# Altium PCB pcb.PcbDoc
Units mil, origin at the board's own origin, x right, y up, seen from the top; angles counter-clockwise.
Board outline 1685 x 2080 mil, 2 copper layers (Top Layer, Bottom Layer); 23 components, 48 nets, 155 pads, 23 vias.
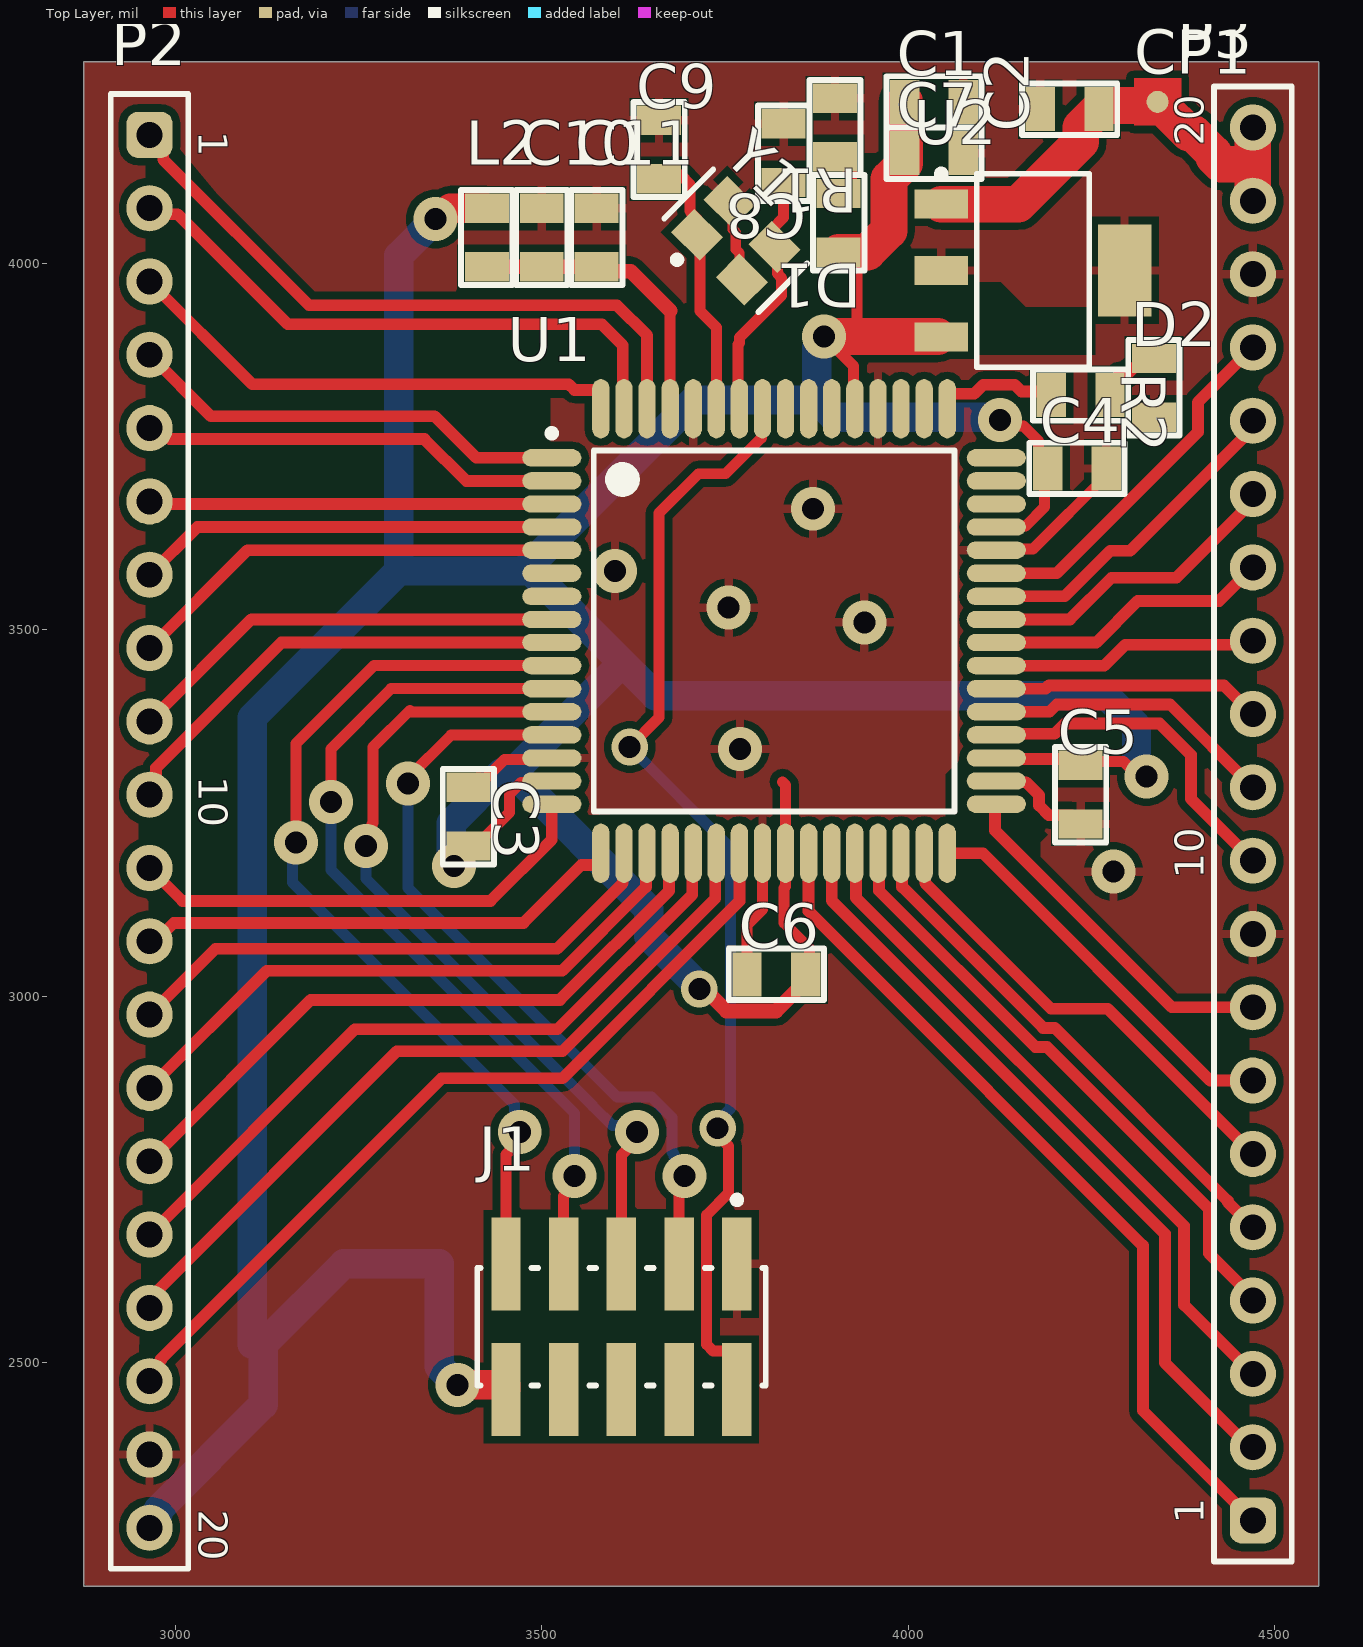
[diagram p0: Top Layer view]
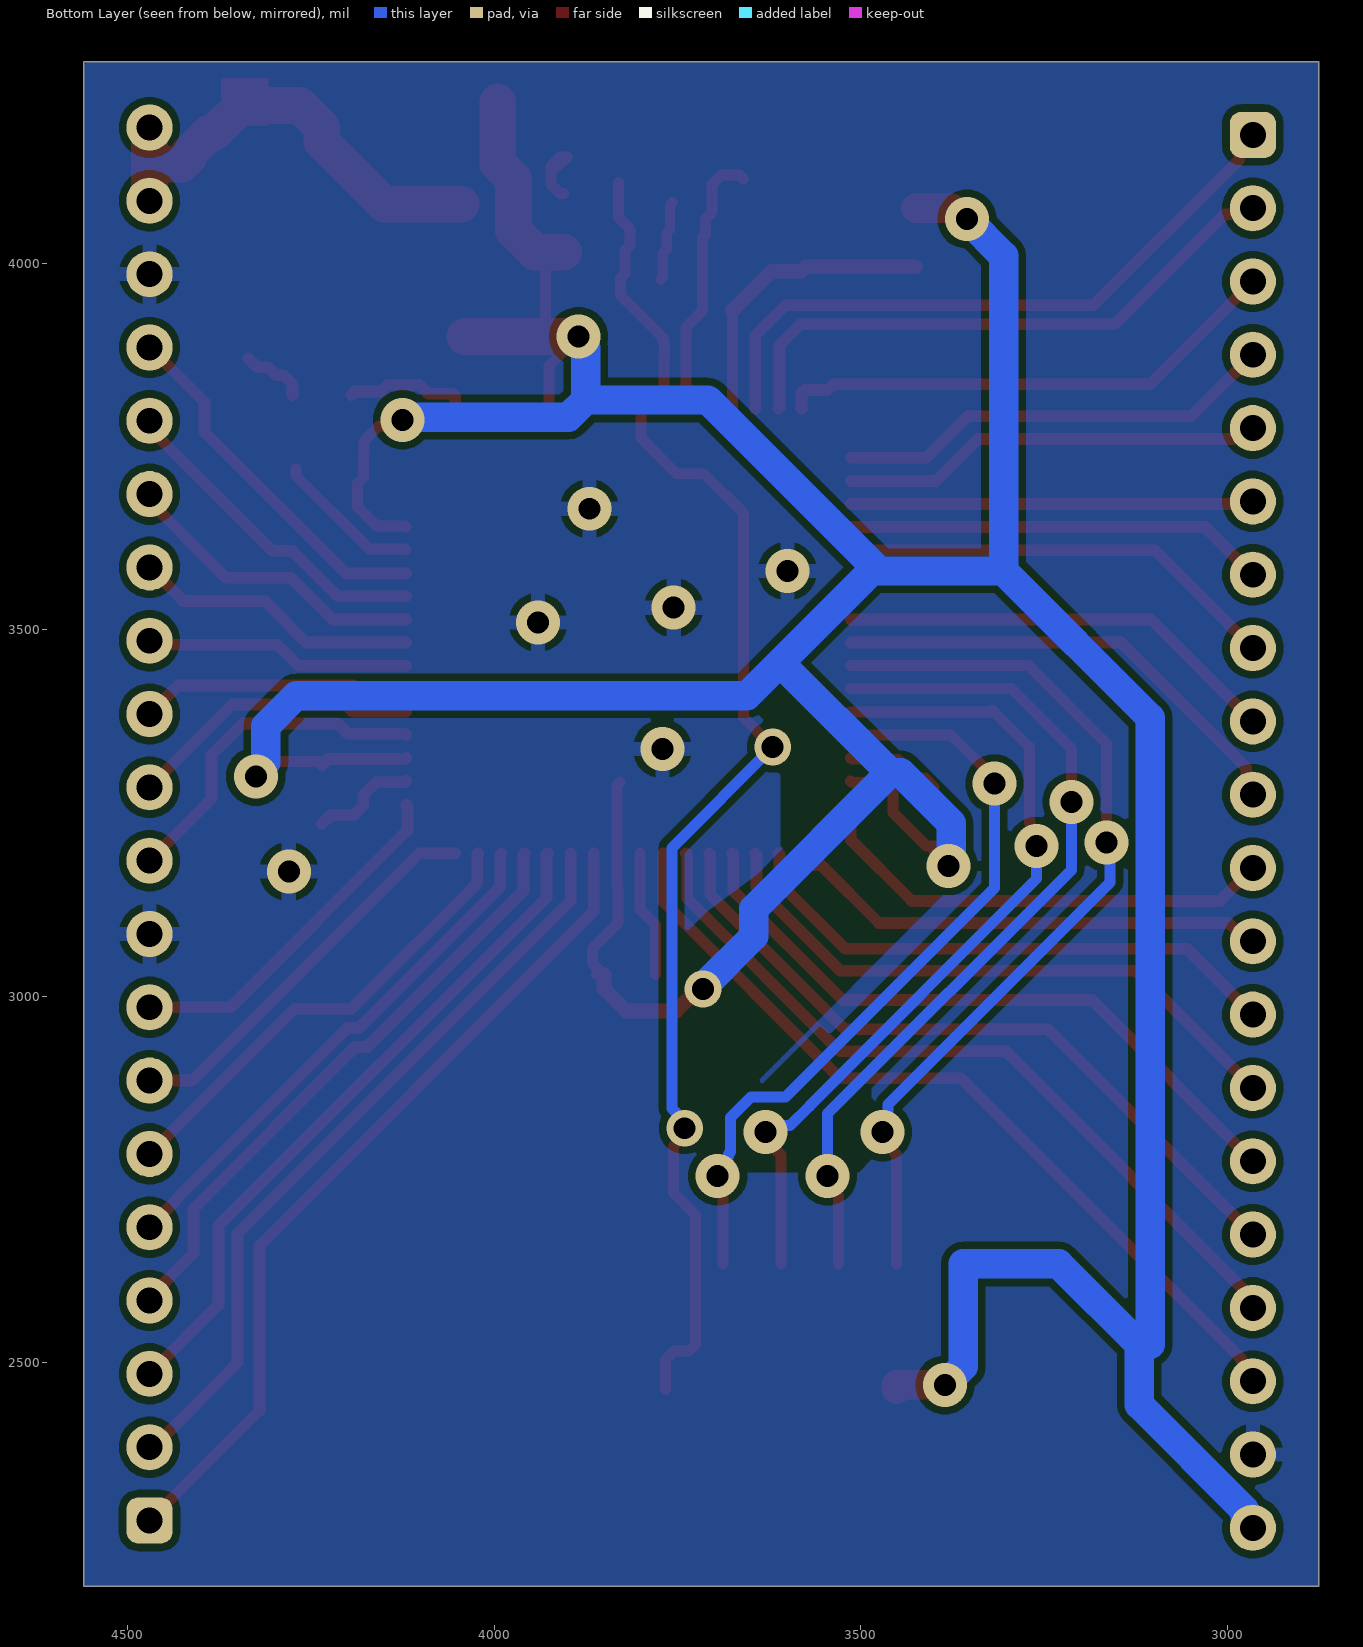
[diagram p1: Bottom Layer view, seen from below]
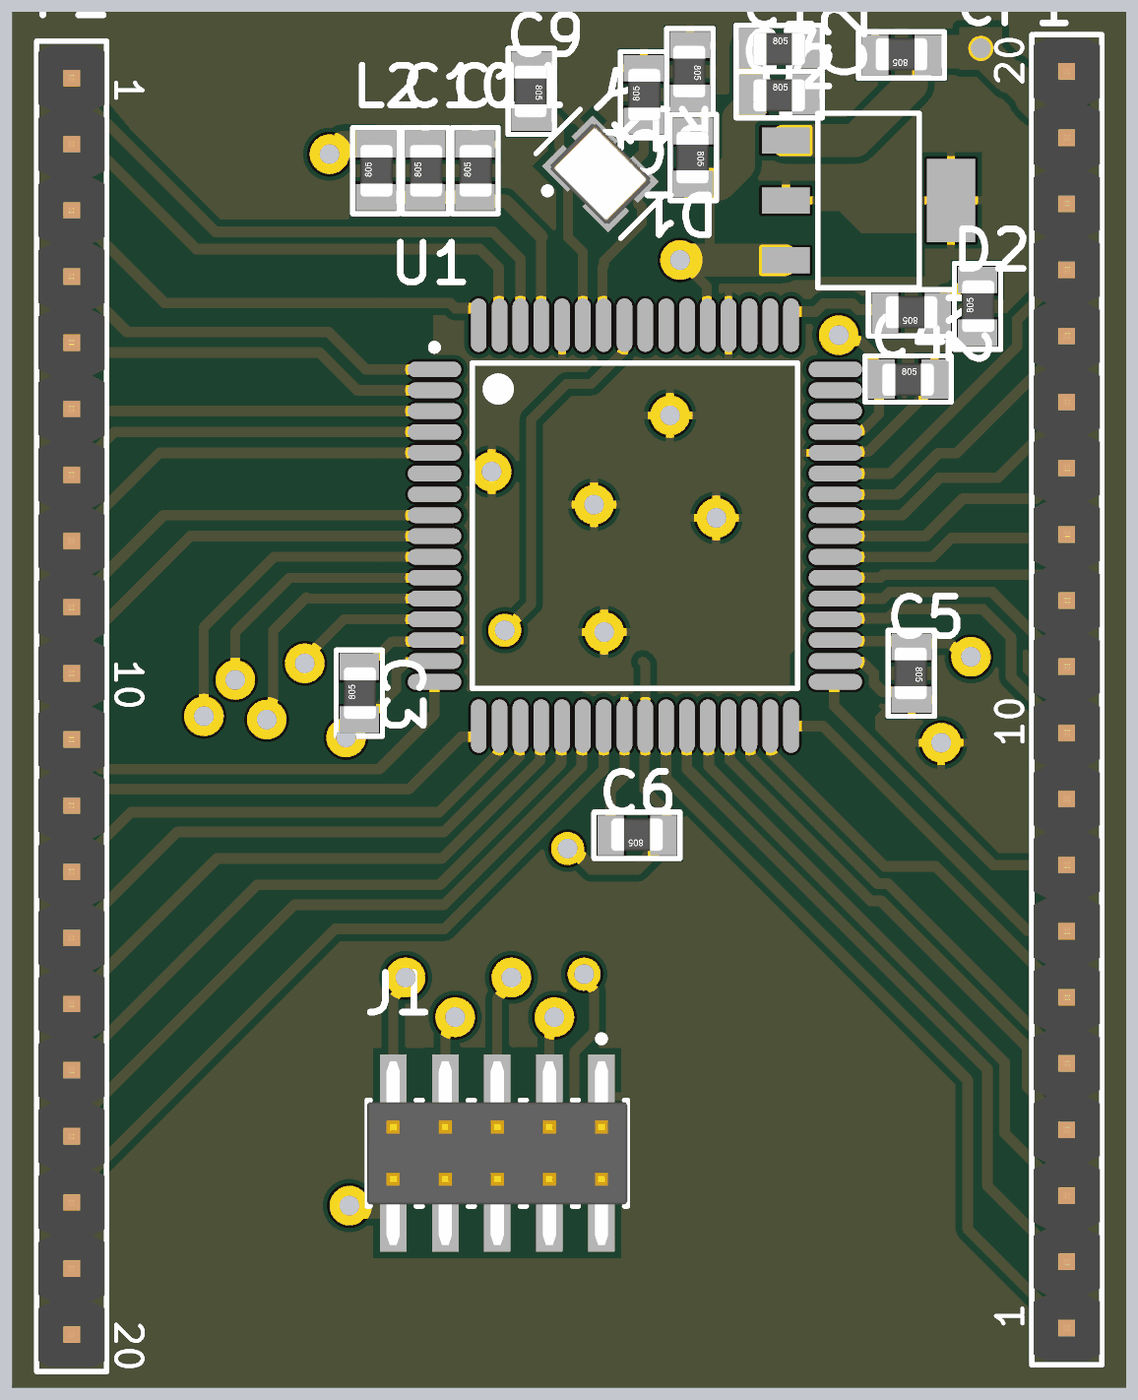
[diagram p2: 3D render of the assembled board from above, using the file's embedded part models]

## Layer stack, top to bottom
Top Solder: solder mask 0.4, Solder Resist, Dk 3.5
Top Layer: signal copper 1.4
Dielectric 1: dielectric 12.6, FR-4, Dk 4.8
Bottom Layer: signal copper 1.4
Bottom Solder: solder mask 0.4, Solder Resist, Dk 3.5

## Board outline
2875,2195 2875,4275 4560,4275 4560,2195

## Design rules (kind name [scope] priority, off if disabled: settings)
Clearance [All] p1: gap=10 ignorepadtopadclearanceinfootprint=FALSE except(5: SMDPad-SMDPad THPad-THPad)
DiffPairsRouting [All] p1: maxlimit=10 minlimit=10 mostfreqgap=10 toplayer_minwidth=15 toplayer_maxwidth=15 toplayer_prefwidth=15 bottomlayer_minwidth=15 bottomlayer_maxwidth=15 bottomlayer_prefwidth=15 maxuncoupledlength=500
PlaneConnect [All] p1: pad.planeconnectstyle=Relief pad.reliefexpansion=20 pad.reliefentries=4 pad.reliefconductorwidth=20 pad.reliefairgap=10 via.planeconnectstyle=Relief via.reliefexpansion=20 via.reliefentries=4 via.reliefconductorwidth=25 via.reliefairgap=10
PolygonConnect [All] p1: connectstyle=Relief reliefconductorwidth=12 reliefentries=4 polygonreliefangle="90 Angle" airgapwidth=10
RoutingVias [All] p1: holewidth=28 width=50 viastyle="Through Hole" minholewidth=28 minwidth=50 maxholewidth=28 maxwidth=50
SolderMaskExpansion [All] p1: expansion=4 istentingtop=FALSE
Width [All] p1: maxlimit=50 minlimit=10 preferedwidth=15 minimp=50.000000 maximp=50.000000 favimp=50.000000
28 further rules are at their usual default settings.

## Classes and differential pairs
differential pair XTAL: +XTAL_P -XTAL_N

## Components (designator, comment, footprint, x,y, rotation, side; value= is the part's Value field where it differs from the comment)
C1 "Capacitor" SMD-0805-RES 4035,4220 r270 top value=1u
C2 "Capacitor" SMD-0805-RES 4220,4210 r90 top value=1u
C3 "Capacitor" SMD-0805-RES 3400,3245 r0 top value=100n
C4 "Capacitor" SMD-0805-RES 4230,3720 r270 top value=100n
C5 "Capacitor" SMD-0805-RES 4235,3275 r180 top value=100n
C6 "Capacitor" SMD-0805-RES 3820,3030 r90 top value=100n
C7 "Capacitor" SMD-0805-RES 4035,4150 r270 top value=10u
C8 "Capacitor" SMD-0805-RES 3830,4150 r0 top value=12p
C9 "Capacitor" SMD-0805-RES 3660,4155 r180 top value=12p
C10 "Capacitor" SMD-0805-RES 3500,4035 r0 top value=10u
C11 "Capacitor" SMD-0805-RES 3575,4035 r0 top value=100n
CP1 "CONNECT_PAD" PAD_SQUARE 4340,4220 r0 top
D1 "Light-Emitting Diode" SMD-0805-RES 3905,4055 r180 top
D2 "Light-Emitting Diode" SMD-0805-RES 4335,3830 r0 top
J1 "TMM-105-01-L-D-SM" FP-TMM-105-01-L-D-SM-MFG 3608.74,2549.27 r180 top
L2 "Inductor" SMD-0805-RES 3425,4035 r0 top value=1u
P2 "61302011121" 61302011121 2965,3225 r270 top
P3 "61302011121" 61302011121 4470,3235 r90 top
R1 "Resistor" SMD-0805-RES 3900,4185 r180 top value=100R
R2 "Resistor" SMD-0805-RES 4235,3820 r90 top value=200R
U1 "ATxmega256A3-AU" 64A_M 3816.85,3498.27 r0 top
U2 "MCP1703A-3302E/DB" MCHP-SOT-223-DB3_N 4170,3990 r0 top
Y1 "TSX-3225 16.0000MF18X-AC3" FP-TSX-3225-MFG 3764.6,4030.4 r315 top

## Footprints (in the part's own frame and the unit in brackets; to place one, negate y for a bottom-side part, rotate by r counter-clockwise, add the part's x,y. Pads: shape width x height; smd on the part's side, far side on the other; paste and mask are expansions set on the pad)
64A_M [mm] "Thin QFP, 64-Leads, Body 14x14mm, Pitch 0.8mm, IPC Low Density"
  oval 2.05x0.6 smd: 1(-7.7,6) 2(-7.7,5.2) 3(-7.7,4.4) 4(-7.7,3.6) 5(-7.7,2.8) 6(-7.7,2) 7(-7.7,1.2) 8(-7.7,0.4) 9(-7.7,-0.4) 10(-7.7,-1.2) 11(-7.7,-2) 12(-7.7,-2.8) 13(-7.7,-3.6) 14(-7.7,-4.4) 15(-7.7,-5.2) 16(-7.7,-6) 33(7.7,-6) 34(7.7,-5.2) 35(7.7,-4.4) 36(7.7,-3.6) 37(7.7,-2.8) 38(7.7,-2) 39(7.7,-1.2) 40(7.7,-0.4) 41(7.7,0.4) 42(7.7,1.2) 43(7.7,2) 44(7.7,2.8) 45(7.7,3.6) 46(7.7,4.4) 47(7.7,5.2) 48(7.7,6)
  oval 0.6x2.05 smd: 17(-6,-7.7) 18(-5.2,-7.7) 19(-4.4,-7.7) 20(-3.6,-7.7) 21(-2.8,-7.7) 22(-2,-7.7) 23(-1.2,-7.7) 24(-0.4,-7.7) 25(0.4,-7.7) 26(1.2,-7.7) 27(2,-7.7) 28(2.8,-7.7) 29(3.6,-7.7) 30(4.4,-7.7) 31(5.2,-7.7) 32(6,-7.7) 49(6,7.7) 50(5.2,7.7) 51(4.4,7.7) 52(3.6,7.7) 53(2.8,7.7) 54(2,7.7) 55(1.2,7.7) 56(0.4,7.7) 57(-0.4,7.7) 58(-1.2,7.7) 59(-2,7.7) 60(-2.8,7.7) 61(-3.6,7.7) 62(-4.4,7.7) 63(-5.2,7.7) 64(-6,7.7)
  silkscreen extent -7.82,-6.25 6.25,6.97, body extent -7,-7 7,7, height 1.6
61302011121 [mm] "Pin Header, pitch 2.54 mm, THT, Vertical, single row, 20p"
  rrect50% 1.6x1.6 hole 0.897: 1(-24.13,0)
  round 1.6 hole 0.897: 2(-21.59,0) 3(-19.05,0) 4(-16.51,0) 5(-13.97,0) 6(-11.43,0) 7(-8.89,0) 8(-6.35,0) 9(-3.81,0) 10(-1.27,0) 11(1.27,0) 12(3.81,0) 13(6.35,0) 14(8.89,0) 15(11.43,0) 16(13.97,0) 17(16.51,0) 18(19.05,0) 19(21.59,0) 20(24.13,0)
  silkscreen extent -25.55,-1.35 25.55,1.35, body extent -25.4,-1.27 25.4,1.27, height 8.57
FP-TMM-105-01-L-D-SM-MFG [mm]
  rect 1.02x3.215 smd paste+0 mask+0: 1(-4,-2.177) 2(-4,2.177) 3(-2,-2.177) 4(-2,2.177) 5(0,-2.177) 6(0,2.177) 7(2,-2.177) 8(2,2.177) 9(4,-2.177) 10(4,2.177)
  silkscreen extent -5,-4.52 5,2.03, body extent -5.1,-3.89 5.1,3.89, height 0.25
FP-TSX-3225-MFG [mm]
  rect 1.4x1.15 smd paste+0 mask+0: 1(-1.1,-0.8) 2(1.1,-0.8) 3(1.1,0.8) 4(-1.1,0.8)
  silkscreen extent -2.3,-2.02 2.3,1.2, body extent -1.9,-1.47 1.9,1.47, height 0.25
MCHP-SOT-223-DB3_N [mm] "SOT223, 3-Leads, Body 6.5x3.5mm, Pitch 2.3mm, IPC Medium Density"
  rect 1.85x1 smd: 1(-3.175,2.3) 2(-3.175,0) 3(-3.175,-2.3)
  rect 1.85x3.2 smd: 4(3.175,0)
  silkscreen extent -3.3,-3.35 1.95,3.47, body extent -1.85,-3.35 1.85,3.35, height 1.8
PAD_SQUARE [mil]
  round 30 smd: 1(0,0)
  Top Layer region: -32.5,-32.5 32.5,-32.5 32.5,32.5 -32.5,32.5
SMD-0805-RES [mil]
  rect 60x40 smd: 1(0,40) 2(0,-40)
  silkscreen extent -35,-65 35,65, body extent -24,-39 26,39, height 31

## Part data
D1 D2: library part LED, AF=1, BV=0, BV_MAX=1e99, CJO=0, CJP=0, CTA=0, CTP=0, EG=1.11, FC=0.5, FCS=0.5, FV_MAX=1e99, IBV=0.001, IKF=0, IKR=0, IS=1e-14, ISR=1e-14, JSW=0, JTUN=0, JTUNSW=0, KEG=1, KF=0, LEVEL=1, MJSW=0.33, N=1, NBV=1, NR=1, NS=1, NTUN=30, PHP=1, RS=0, SimulationGenericComponent=True, TCV=0, TLEV=0, TLEVC=0, TM1=0, TM2=0, TNOM=27, TPB=0, TPHP=0, TRS=0, TRS2=0, TT=0, TTT1=0, TTT2=0, VJ=1, XTI=3, XTITUN=3
J1: library part CMP-02766-001581-1, "CONN HEADER SMD 10POS 2MM", Flammability Rating="UL94 V-0", Housing Color=Black, Max Current Rating=3.9A, Max Operating Temperature=125°C, Max Voltage Rating (AC)=500V, Min Operating Temperature=-55°C, Connector Type=Header, Contact Finish - Mating=GOLD, Contact Material=Bronze, Contact Plating=Gold, Contact Shape=Square, Contact Type="Male Pin", Depth=3.94mm, Fastening Type=Pull, Gender=Male, Housing Material=Polymer, Insulation Color=Black, Insulation Material=Polymer, Lead Free="Lead Free", Length=10mm, Number of Contacts=10, Number of Positions=10, Number of Rows=2, Orientation=Straight, Packaging=Rail/Tube, Pitch=2mm, Radiation Hardening=No, REACH SVHC="No SVHC", RoHS Compliant=Yes, Series=TMM, Termination=Solder
P2 P3: library part CMP-1502-01102-2, Color=Black, Contact Resistance=20mΩ, Current Rating=3A, Operating Supply Voltage=250V, Connector Type="Male Pin", Contact Material=Copper, Contact Mating Length=5.9944mm, Contact Plating=Gold, Gender=Male, Lead Pitch=2.54mm, Mount="Through Hole", NexarPartId=32855554, Number of Contacts=20, Number of Pins=20, Number of Positions=20, Number of Rows=1, Orientation=Vertical, Packaging=Bulk, Pitch=2.54mm, REACH SVHC=Unknown, RoHS=Compliant, Termination=Solder
U1: library part CMP-0094-00038-3, "8/16-bit AVR XMEGA A3 Microcontroller, 1.6-3.6V, 32MHz, 256KB + 8KB Flash, 4KB EEPROM, 16KB SRAM, 64-pin TQFP, Industrial Grade (-40°C to 85°C), Pb-Free", Manufacturer=Atmel, Code_JEDEC=MS-026-AEB, ComponentLink1Description="Manufacturer URL", ComponentLink1URL=http://www.atmel.com/, ComponentLink2Description=Datasheet, ComponentLink2URL=http://www.atmel.com/Images/Atmel-8068-8-and16-bit-AVR-XMEGA-A3-Microcontrollers_Datasheet.pdf, DatasheetVersion="revU, Jun-2013", PackageDescription="64-Pin Plastic Thin Profile Quad Flat Pack, 14 x 14 x 1.0 mm Body, 0.8 mm Pitch (TQFP)", PackageReference=64A, PackageVersion="revC, Oct-2010", PartNumber=ATxmega256A3-AU, RevisionNote="datasheet versionæ›´æ–°ï¼ŒPartAä¸Šä¸‹ç¼©çŸ­10,ç®¡è„šåå¤–éœ²æ”¾å®½20,pin20 40 SSåŠ bar, PartB GNDæŒ‰é¡ºåºæŽ’åˆ—"
U2: library part CMP-0136-01118-1, "250 mA, 16 V, Low Quiescent Current LDO Regulator, -40 to 125 degC, 3-pin SOT-223 (DB3), Tube", Manufacturer=Microchip, ComponentLink1Description="Manufacturer URL", ComponentLink1URL=http://www.microchip.com, ComponentLink2Description=Datasheet, ComponentLink2URL=http://ww1.microchip.com/downloads/en/DeviceDoc/25122A.pdf, ComponentLink3Description="Package Specification", ComponentLink3URL=http://www.microchip.com/stellent/groups/techpub_sg/documents/packagingspec/en012702.pdf, ComponentLink4Description="Product URL", ComponentLink4URL=http://www.microchip.com/MCP1703A, DatasheetVersion="Rev. A", Mounting Technology="Surface Mount", PackageDescription="3-Lead Plastic Small Outline Transistor, 6.5 x 3.5 mm Body, 2.3 mm Pitch", PackageReference=SOT-223-DB3, PackageVersion=C04-032B, PartNumber=MCP1703A-3302E/DB
Y1: library part CMP-2000-07332-2, "CRYSTAL 16.0000MHZ 9PF SMD", Case/Package=SMD/SMT, ESR (Equivalent Series Resistance)=60R, Frequency=16MHz, Frequency Stability=18ppm, Frequency Tolerance=10ppm, Load Capacitance=9pF, Max Operating Temperature=85°C, Min Operating Temperature=-40°C, Package Quantity=250, Drive Level=200uW, Height=0.024inch, Lead Free="Lead Free", Length=0.126inch, Mount="Surface Mount", Packaging="Tape and Reel", RoHS Compliant=Yes, Series=TSX-3225, Termination=SMD/SMT, Tolerance=10ppm, Weight=0.000564oz, Width=0.098inch
C1 C2 C3 C4 C5 C6 C7 C8 C9 C10 C11 L2: SimulationGenericComponent=True
R1 R2: SimulationGenericComponent=True, TC1=0, TC2=0

## Via types
v1: diameter 60, hole 30, Top Layer to Bottom Layer, 20 vias
v2: diameter 50, hole 30, Top Layer to Bottom Layer, 3 vias

## Nets (pads, with @x,y where several pads share a name; then routed paths per layer and width w, separated by ;. In a path a pad name is that pad's centre, name@x,y a point inside that pad or via, vN(x,y) a via of type N, cw(c..) or ccw(c..) an arc to the next point about the centre after c; other vN are vias at no path point)
3V3: C1.2 C3.2 C4.2 C5.2 C6.2 C7.2 D1.1 J1.10 L2.1 P2.20 U1.15 U1.25 U1.35 U1.45 U1.53 U2.3 | length 7116.9
  Top Layer w15: v1(3380,3178) 3400,3198 C3.2 3410,3205 3455.85,3250.85 3455.85,3275.85 3471.89,3291.89 3512.05,3291.89 U1.15 ; 3828.56,3292.53 3832.6,3288.5 U1.25 3832.6,3149.61 3830.75,3147.76 3830.75,3099.76 3865.51,3065 3865.51,3045 C6.2@3855.26,3034.74 ; C6.2@3850.51,3030 C6.2 ; v1(3885,3900) 3925.44,3859.56 3925.44,3803.07 U1.53 ; D1.1@3927.5,4002.5 3927.5,3996.21 3930,3993.71 3930,3900 ; U2.3@4025.55,3899.45 U2.3 ; U1.45 4121.65,3641.65 4160.15,3641.65 4186,3667.5 4186,3699.71 4177.85,3707.85 4177.85,3742.15 4177.5,3742.5 4177.5,3757.5 4157.31,3777.69 4133.73,3777.69 v1(4125.12,3786.3) ; C5.2 4240,3320 4293.71,3320 4313.71,3300 v1(4325,3300)
  Top Layer w16: U1.35 4121.46,3323.58 4226.42,3323.58 C5.2
  Top Layer w20: v2(3715,3010) 3721.72,3010 3751.72,2980 3820,2980 3850,3010 3850,3029.49 C6.2@3850.51,3030
  Top Layer w40: v1@3375.41,4075 L2.1 ; v1(3385,2470) 3451.18,2470 3451.26,2469.92 J1.10
  Top Layer w50: v1(3885,3900) 3930,3900 3950,3900 U2.3@4040,3900 ; D1.1 3944.29,4015 3973.58,4044.29 3973.58,4114.73 C7.2@3995,4136.15 ; C7.2 C7.2@3995,4136.15 ; C1.2 C7.2@3995,4136.15
  Bottom Layer w40: P2.20 2965,2281.22 2976.5,2292.72 2976.5,2299.53 3120,2443.03 3120,2525 3230,2635 3360,2635 3360,2495 v1(3385,2470) ; 3105,2525 3105,3380 3305,3580 ; v1(3355,4060) 3305,4010 3305,3580 ; v1(3380,3178) 3376.35,3181.65 3376.35,3235.93 3445.41,3305 3460,3305 ; 3490,3575 3610,3455 ; v2(3715,3010) 3715,3012.71 3645.75,3081.95 3645.75,3119.25 3460,3305 ; v1(3885,3900) 3885,3894.59 3875,3884.59 3875,3813.43 ; v1(4125.12,3786.3) 4121.42,3790 3898.43,3790 3875,3813.43 ; v1(4325,3300) 4325,3305.41 4311.36,3319.05 4311.36,3368.64 4270,3410 3655,3410 3610,3455 ; 3305,3580 3475,3580 3708.43,3813.43 3875,3813.43 ; 3460,3305 3610,3455
GND: C1.1 C2.1 C3.1 C4.1 C5.1 C6.1 C7.1 C8.1 C9.2 C10.1 C11.1 D2.2 J1.1 P2.19 P3.9 P3.18 R1.2 U1.14 U1.24 U1.34 U1.44 U1.52 U1.60 U2.2 U2.4 Y1.2 Y1.4 | length 766.4
  Top Layer w14: Y1.4 3760.13,4079.41 3760.13,4046.39 3764.6,4041.91 3764.6,4018.89 3769.87,4013.61 3769.87,3980.59 Y1.2
  Top Layer w15: C3.1 3412.5,3297.5 3423.84,3297.5 3449.2,3322.85 3476.88,3322.85 3477.41,3323.39 3512.05,3323.39 U1.14 ; C6.1 3780,3096.99 3801.1,3118.1 U1.24 ; U1.44 4121.65,3610.15 4170.15,3610.15 4270,3710 C4.1
  Top Layer w16: U1.34 4121.46,3292.08 4160.66,3292.08 4178.35,3274.4 4178.35,3260.22 4191.58,3247 4223,3247 C5.1
  other v1: 4280,3170 3770.35,3337.35 3940,3510 3755,3530 3600,3580 3870,3665
NetC10_2: C10.2 C11.2 L2.2 U1.61 | length 408.5
  Top Layer w15: U1.61 3675.12,3824.41 3675.12,3934.88
  Top Layer w20: L2.2 C10.2 C11.2 3581.21,3988.79 3621.21,3988.79 3675.12,3934.88
NetD1_2: D1.2 R1.1 | length 103
  Top Layer w15: D1.2 3910,4095 3922.5,4107.5 R1.1@3922.5,4132.5 ; R1.1@3922.5,4132.5 3917.5,4137.5 3910,4145 R1.1 3905,4140 3912.5,4132.5 R1.1@3922.5,4132.5
NetD2_1: D2.1 R2.2 | length 89.5
  Top Layer w16: R2.2 4275,3825 4275,3835 4287,3847 4297,3847 4308,3858 4323,3858 4330,3865 D2.1
NetP2_1: P2.1 U1.62 | length 900.7
  Top Layer w16: P2.1 2983.71,4156.29 2983.71,4141.29 3182.5,3942.5 3602.5,3942.5 3643.62,3901.38 3643.62,3824.41 U1.62
NetP2_2: P2.2 U1.63 | length 810.3
  Top Layer w16: P2.2 2973.24,4066.76 3003.24,4066.76 3153.5,3916.5 3582.07,3916.5 3610.67,3887.91 3610.67,3802.88 U1.63
NetP2_3: P2.3 U1.64 | length 700.5
  Top Layer w16: P2.3 3105,3835 3536.82,3835 3544.82,3827 3577.11,3827 3580.63,3823.48 U1.64
NetP2_4: P2.4 U1.1 | length 606.9
  Top Layer w16: P2.4 3048.78,3791.22 3353.78,3791.22 3410.51,3734.49 U1.1
NetP2_5: P2.5 U1.2 | length 582
  Top Layer w16: P2.5@2962.52,3777.48 2975.23,3777.48 2992.72,3760 3340,3760 3397.01,3702.99 U1.2
NetP2_6: P2.6 U1.3 | length 550.2
  Top Layer w16: P2.6 2968.5,3671.5 U1.3
NetP2_7: P2.7 U1.4 | length 575.6
  Top Layer w16: P2.7 3030,3640 U1.4
NetP2_8: P2.8 U1.5 | length 604
  Top Layer w16: P2.8 3098.5,3608.5 U1.5
NetP2_9: P2.9 U1.8 | length 606.3
  Top Layer w16: P2.9 3104.02,3514.02 U1.8
NetP2_10: P2.10 U1.9 | length 651
  Top Layer w16: P2.10 2973.99,3283.99 2973.99,3311.87 3144.64,3482.52 U1.9
NetP2_11: P2.11 U1.16 | length 650.4
  Top Layer w16: P2.11 3010,3130 3430,3130 3513.7,3213.7 U1.16
NetP2_12: P2.12 U1.17 | length 672.7
  Top Layer w16: P2.12 2972.87,3075 2997.87,3100 3475,3100 3554.19,3179.19 3577.11,3179.19 3580.63,3182.71 U1.17
NetP2_13: P2.13 U1.18 | length 761.3
  Top Layer w16: P2.13 3055,3065 3521.21,3065 3610.67,3154.45 3610.67,3193.66 U1.18
NetP2_14: P2.14 U1.19 | length 837.3
  Top Layer w16: P2.14 3125,3035 3527.98,3035 3642.16,3149.18 3642.16,3193.66 U1.19
NetP2_15: P2.15 U1.20 | length 913.3
  Top Layer w16: P2.15 3185,2995 3524.75,2995 3673.66,3143.91 3673.66,3193.66 U1.20
NetP2_16: P2.16 U1.21 | length 989.3
  Top Layer w16: P2.16 3245,2955 3521.52,2955 3705.16,3138.63 3705.16,3193.66 U1.21
NetP2_17: P2.17 U1.22 | length 1072.7
  Top Layer w16: P2.17 2965,2587.72 3302.28,2925 3528.29,2925 3736.65,3133.36 3736.65,3193.66 U1.22
NetP2_18: P2.18 U1.23 | length 1150.1
  Top Layer w16: P2.18 2965,2487.72 2980.74,2503.46 2980.74,2505.74 3363.36,2888.36 3528.42,2888.36 3769.61,3129.54 U1.23
NetR2_1: R2.1 U1.49 | length 171.4
  Top Layer w16: U1.49 4053.07,3818.44 4056.59,3821.96 4089.9,3821.96 4102.24,3834.3 4145,3834.3 4154.3,3825 4190,3825 R2.1
PD0: P3.1 U1.26 | length 1161.3
  Top Layer w16: U1.26 3863.93,3194.95 3863.93,3116.07 3890.81,3089.19 3890.87,3089.19 3900.24,3079.82 3900.24,3079.76 4320,2660 4320,2435 P3.1
PD1: P3.2 U1.27 | length 1034.4
  Top Layer w16: U1.27 3895.59,3130.61 4350,2676.2 4350,2500 P3.2@4456.8,2393.2
PD2: P3.3 U1.28 | length 935
  Top Layer w16: U1.28 3928.55,3193.66 3928.55,3134.43 4376,2686.97 4376,2579 P3.3
PD3: P3.4 U1.29 | length 833.3
  Top Layer w16: U1.29 3960.04,3193.66 3960.04,3143.91 4173.06,2930.89 4189.11,2930.89 4410,2710 4410,2649.67 P3.4@4474.67,2585
PD4: P3.5 U1.30 | length 718.3
  Top Layer w16: U1.30 3991.54,3193.66 3991.54,3149.18 4183.83,2956.89 4199.88,2956.89 4436,2720.77 4436,2719 P3.5
PD5: P3.6 U1.31 | length 641.3
  Top Layer w16: U1.31 4023.03,3193.66 4023.03,3154.45 4194.59,2982.89 4272.11,2982.89 P3.6
PD6: P3.7 U1.32 | length 544.4
  Top Layer w16: U1.32 4101.88,3195.12 4412,2885 P3.7@4469,2885
PD7: P3.8 U1.33 | length 480.9
  Top Layer w16: U1.33 4120,3260.38 4118.15,3258.53 4118.15,3226.24 4359.39,2985 4448.37,2985 P3.8@4458.37,2975
PE0: P3.10 U1.36 | length 469
  Top Layer w16: U1.36 4121.46,3357.99 4155.39,3357.99 4155.62,3358.22 4199.53,3358.22 4213.31,3372 4343,3372 4385.45,3329.55 4385.45,3269.55 P3.10
PE1: P3.11 U1.37 | length 400.9
  Top Layer w16: U1.37 4192.58,3388.03 4202.54,3398 4357,3398 P3.11
PE2: P3.12 U1.38 | length 368
  Top Layer w16: U1.38 4187.3,3419.53 4191.77,3424 4430.52,3424 4469.52,3385 P3.12
PE3: P3.13 U1.39 | length 364.1
  Top Layer w16: U1.39 4267.3,3451.02 4295.79,3479.51 4464.51,3479.51 P3.13
PE4: P3.14 U1.40 | length 392.4
  Top Layer w16: U1.40 4256.18,3482.52 4312.91,3539.25 4424.25,3539.25 P3.14
PE5: P3.15 U1.41 | length 426.7
  Top Layer w16: U1.41 4220.44,3514.02 4277.18,3570.75 4365.75,3570.75 4470,3675 P3.15
PE6: P3.16 U1.42 | length 455.1
  Top Layer w16: U1.42 4213.23,3545.51 4275.54,3607.82 4302.82,3607.82 4470,3775 P3.16
PE7: P3.17 U1.43 | length 501.3
  Top Layer w16: U1.43 4202.46,3577.01 4395,3769.54 4395,3810 P3.17
RESET: J1.2 U1.57 | length 1546.2
  Top Layer w15: v2(3620,3340) 3660,3380 3660,3659.15 3713.59,3712.74 3750.93,3712.74 3799.45,3761.27 3799.45,3799.77 U1.57 ; v2(3740,2820) 3740,2810.53 3755,2795.53 3755,2731.89 3725.06,2701.95 3725.06,2525.14 3733.85,2516.35 3753.64,2516.35 3766.22,2503.78 J1.2
  Bottom Layer w15: v2(3620,3340) 3757.5,3202.5 3757.5,2846.97 3740,2829.47 v2(3740,2820)
TCK: J1.5 U1.12 | length 1151.1
  Top Layer w15: v1(3260,3205) 3268.61,3213.61 3268.61,3234.9 3270,3236.29 3270,3340 3320,3390 3321.97,3388.03 U1.12 ; J1.5 3608.74,2783.71 3630,2804.97 v1(3630,2815)
  Bottom Layer w15: v1(3260,3205) 3260,3160.36 3570,2850.36 3570,2850 3596.39,2823.61 3621.39,2823.61 v1(3630,2815)
TDI: J1.7 U1.11 | length 1181.6
  Top Layer w15: v1(3212.5,3265) 3212.5,3337.5 3294.53,3419.53 U1.11 ; J1.7 3530,2727.82 3545,2742.82 v1(3545,2755)
  Bottom Layer w15: v1(3212.5,3265) 3212.5,3172.5 3545,2840 v1(3545,2755)
TDO: J1.3 U1.13 | length 1070.3
  Top Layer w15: v1(3317.5,3290) 3317.5,3297.5 3376.54,3356.54 U1.13 ; J1.3 3687.48,2747.48 v1(3695,2755)
  Bottom Layer w15: v1(3317.5,3290) 3317.5,3147.5 3602.5,2862.5 3649.68,2862.5 3677.5,2834.68 3677.5,2787.5 3680.38,2784.62 3680.38,2781.8 3695,2767.18 v1(3695,2755)
TMS: J1.9 U1.10 | length 1240.9
  Top Layer w15: v1(3165,3210) 3165,3345 3271.02,3451.02 U1.10 ; J1.9 3451.26,2784.08 3470,2802.82 v1(3470,2815)
  Bottom Layer w15: v1(3165,3210) 3160,3205 3160,3155 3462.88,2852.12 3462.88,2822.12 v1(3470,2815)
VBAT: C2.2 CP1.1 P3.19 P3.20 U2.1 | length 601.7
  Top Layer w50: U2.1 4150.05,4080.55 4235,4165.5 4235,4185 C2.2 4265,4215 4335,4215 CP1.1 ; CP1.1@4347.5,4212.5 4382.86,4177.14 4389.01,4177.14 4416.42,4149.73 4416.42,4144.54 4425.96,4135 4449.9,4135 ; P3.19 P3.20
XTAL_N: C8.2 U1.58 Y1.3 | length 345.8
  Top Layer w15: U1.58 3767.96,3803.07 3767.96,3873.83 3767.76,3874.03 3767.76,3889.03 3769.94,3891.21 3769.94,3898.83 3827.26,3956.15 3827.26,3979.96 3821.37,3985.85 3821.37,4018.17 Y1.3 3814.41,4025.13 3814.41,4046.54 3830,4062.12 C8.2
XTAL_P: C9.1 U1.59 Y1.1 | length 370
  Top Layer w15: C9.1 3665,4120 3690,4120 3702.5,4107.5 3702.5,4071.15 3703.65,4070 3703.65,4068.21 3711.71,4060.16 Y1.1 ; Y1.1@3712.11,4038.35 3715.59,4034.87 3715.59,3934.97 3738.11,3912.44 U1.59
pads on no net: J1.4 J1.6 J1.8 U1.6 U1.7 U1.46 U1.47 U1.48 U1.50 U1.51 U1.54 U1.55 U1.56

## Polygon pours and split planes (outlines as drawn)
GND on Bottom Layer "GND_L02_P001" (solid, pour order 1): 2875,4275 4555,4275 4560,4270 4560,2195 2875,2195
GND on Top Layer "GND_L01_P000" (solid, pour order 0): 2875.12,4276.2 2876.32,4275 4560,4275 4560,2195 2875,2195

## Other copper
Top Layer:
  pour cut-out: 2950.31,2465.31 3550.31,3065.31 3740,3255 3400,3240 3030,3255 2965.31,3190.31
  pour cut-out: 4015,3875 3995,3875 3960,3910 4023.19,3973.19 4023.19,3973.69 4126.31,3973.69 4160,3940 4255,3940 4255,3875
  pour cut-out: 3890,4115 3905,4130 3905,4150 3955,4150 3990,4115 3990,3940 3895,3845 3763.81,3845 3754.41,3854.41 3825,3925 3825,4070 3855,4100
  pour cut-out: 3421.18,2708.29 3421.18,2390.26 3736.14,2390.26 3735,2391.4 3735,2710
  pour cut-out: 4263.74,3633.74 4395,3765 4395,3810 4475,3895 4475,3835.32 4475,3810 4450,3787.65 4450,3755 4297.24,3602.24 4265.75,3633.74
  pour cut-out: 4025,4260 4045,4260 4055,4250 4055,4080 4035,4060 4025,4070 4025,4238.4
  pour cut-out: 3210,3555 3205,3555 2950,3300 2950,3205 3430,3205 3455,3230 3455,3550
  pour cut-out: 3766.07,3177.22 3766.07,3171.07 3680,3085 3715,3050 3715,3025 3728.84,3025 3745.38,3008.46 3770,3033.08 3770,3130 3795,3155 3785,3165 3785,3180
  pour cut-out: 3511.85,3876.85 3511.85,3539.25 3205.75,3539.25 3200,3545 3005,3350 3005,3335 2975,3335 2960,3350 2960,4205 2965,4205 3182.5,3942.5
  pour cut-out: 4433.78,3764.74 4310,3640.95 4310,3410 4465,3255 4475,3255 4475,3835.32 4486.02,3846.33
  pour cut-out: 4095,3185 4145,3185 4345,2985 4440,2985 4465,2960 4465,2305 4450,2305 4320,2435 4320,2705 3970,3055 4095,3180 4095,3190
  pour cut-out: 2969.12,4070.88 2965,4066.76 2965,3975 3110,3830 3570,3830 3570,3900 3525,3945 3141.96,3945 2981.02,4105.94 2981.02,4036.33
  pour cut-out: 4051.22,3302.63 4067.37,3318.78 4076.15,3310 4125,3310 4125,3285 4190,3220 4180,3210 4180,3185 4110,3185 4051.22,3243.78
Bottom Layer:
  pour cut-out: 3675,2740 3654.73,2760.27 3502.9,2760.27 3485,2778.17 3485,2950 3545,2950 3555,2960 3675,2840
  pour cut-out: 3562.5,2915 3602.5,3235 3514.65,3322.85 3392.85,3322.85 3269.63,3199.63
  pour cut-out: 3470,3295 3390,3215 3365,3215 3365,3160 3700,2825 3727.79,2852.79 3752.84,2852.79 3752.84,3072.16 3710,3115

## Silkscreen, mask and mechanical layers (free items; w line width, h text height)
Mechanical 1:
  the board outline again, w40

## Text inside footprints (layer, text, board x,y; h text height)
P2: Top Overlay "10" at 3031.93,3299.8 h40 r270; Top Overlay "1" at 3031.93,4179.72 h40 r270; Top Overlay "20" at 3031.93,2299.8 h40 r270
P3: Top Overlay "10" at 4403.07,3160.2 h40 r90; Top Overlay "1" at 4403.07,2280.28 h40 r90; Top Overlay "20" at 4403.07,4160.2 h40 r90